# EAGLE board Qwiic-Step-Panel (EAGLE 9.4.2), part 1 of 2
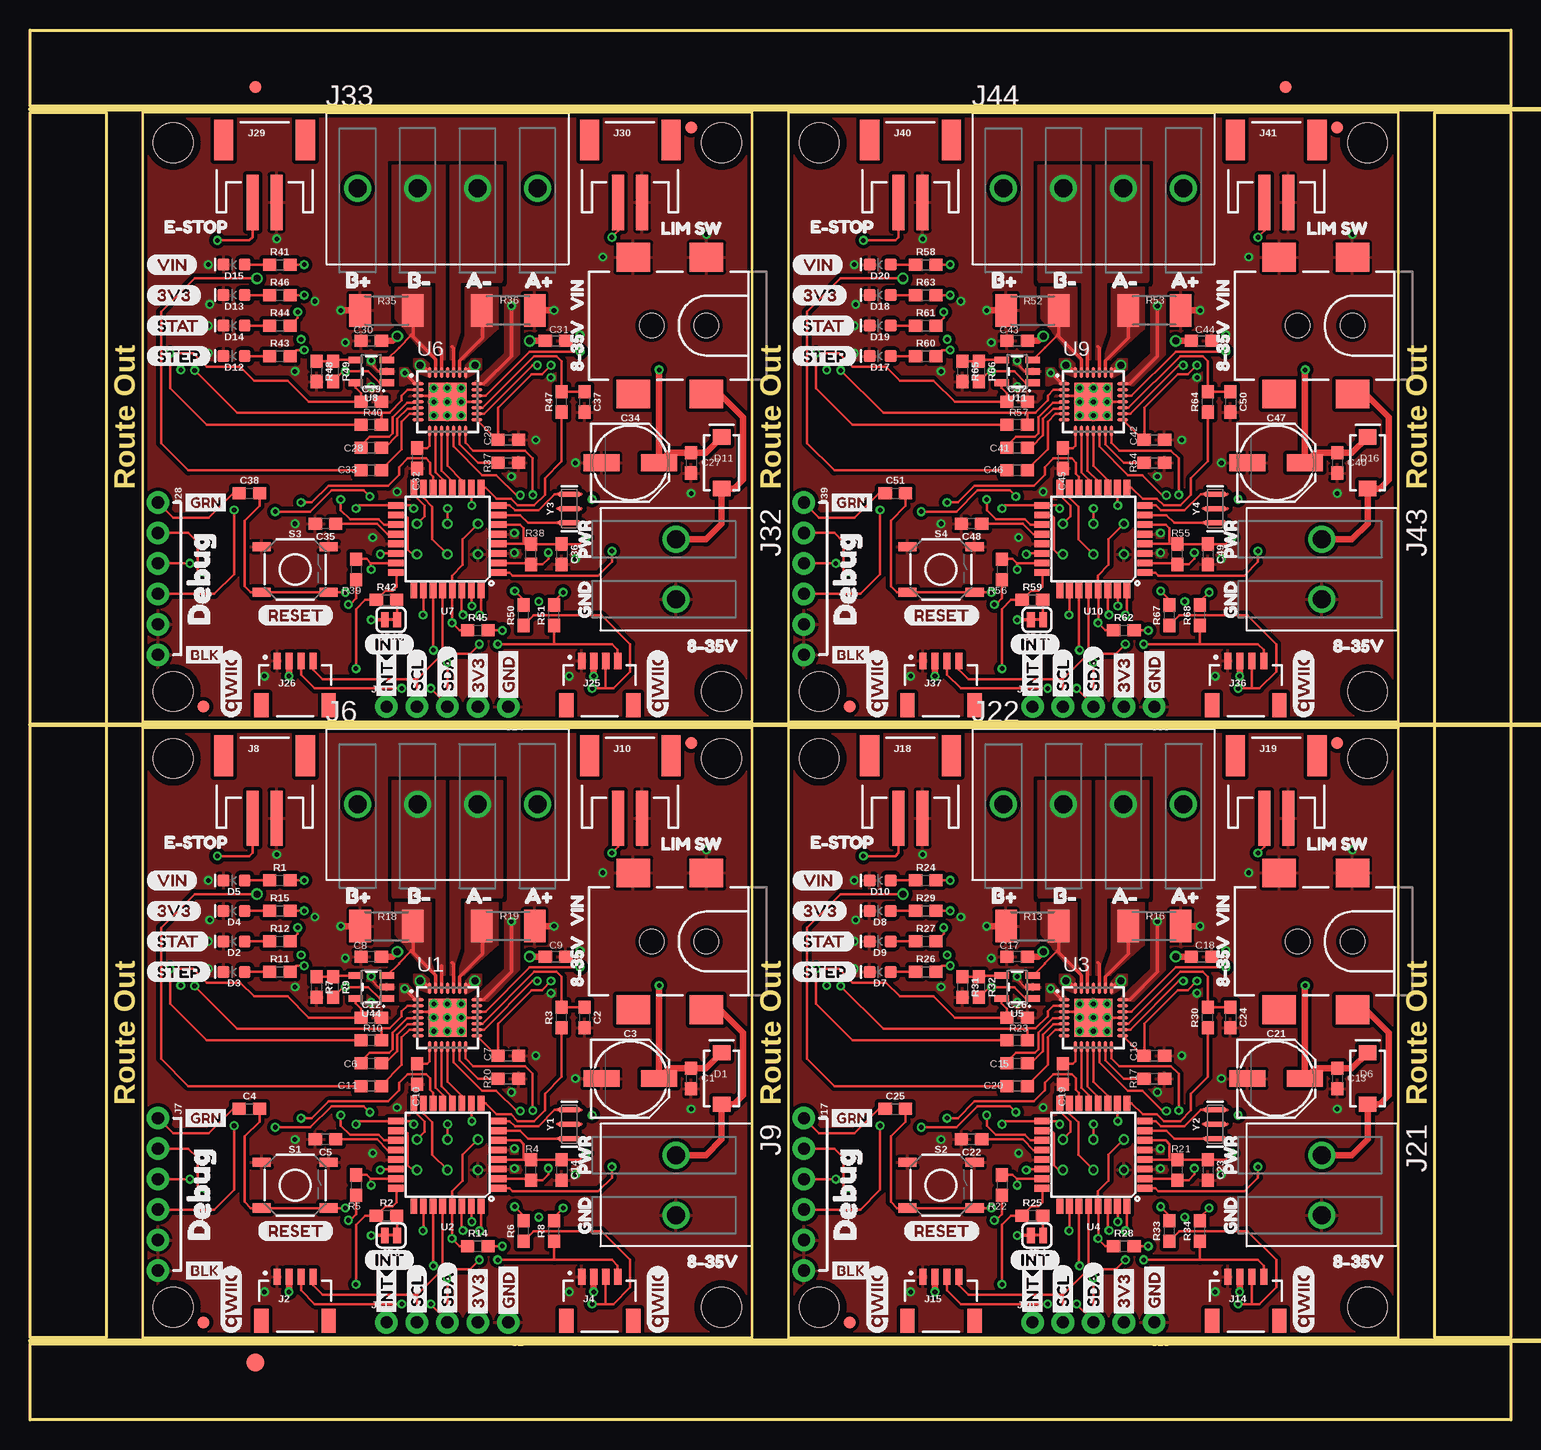
[diagram p0: board, top side]
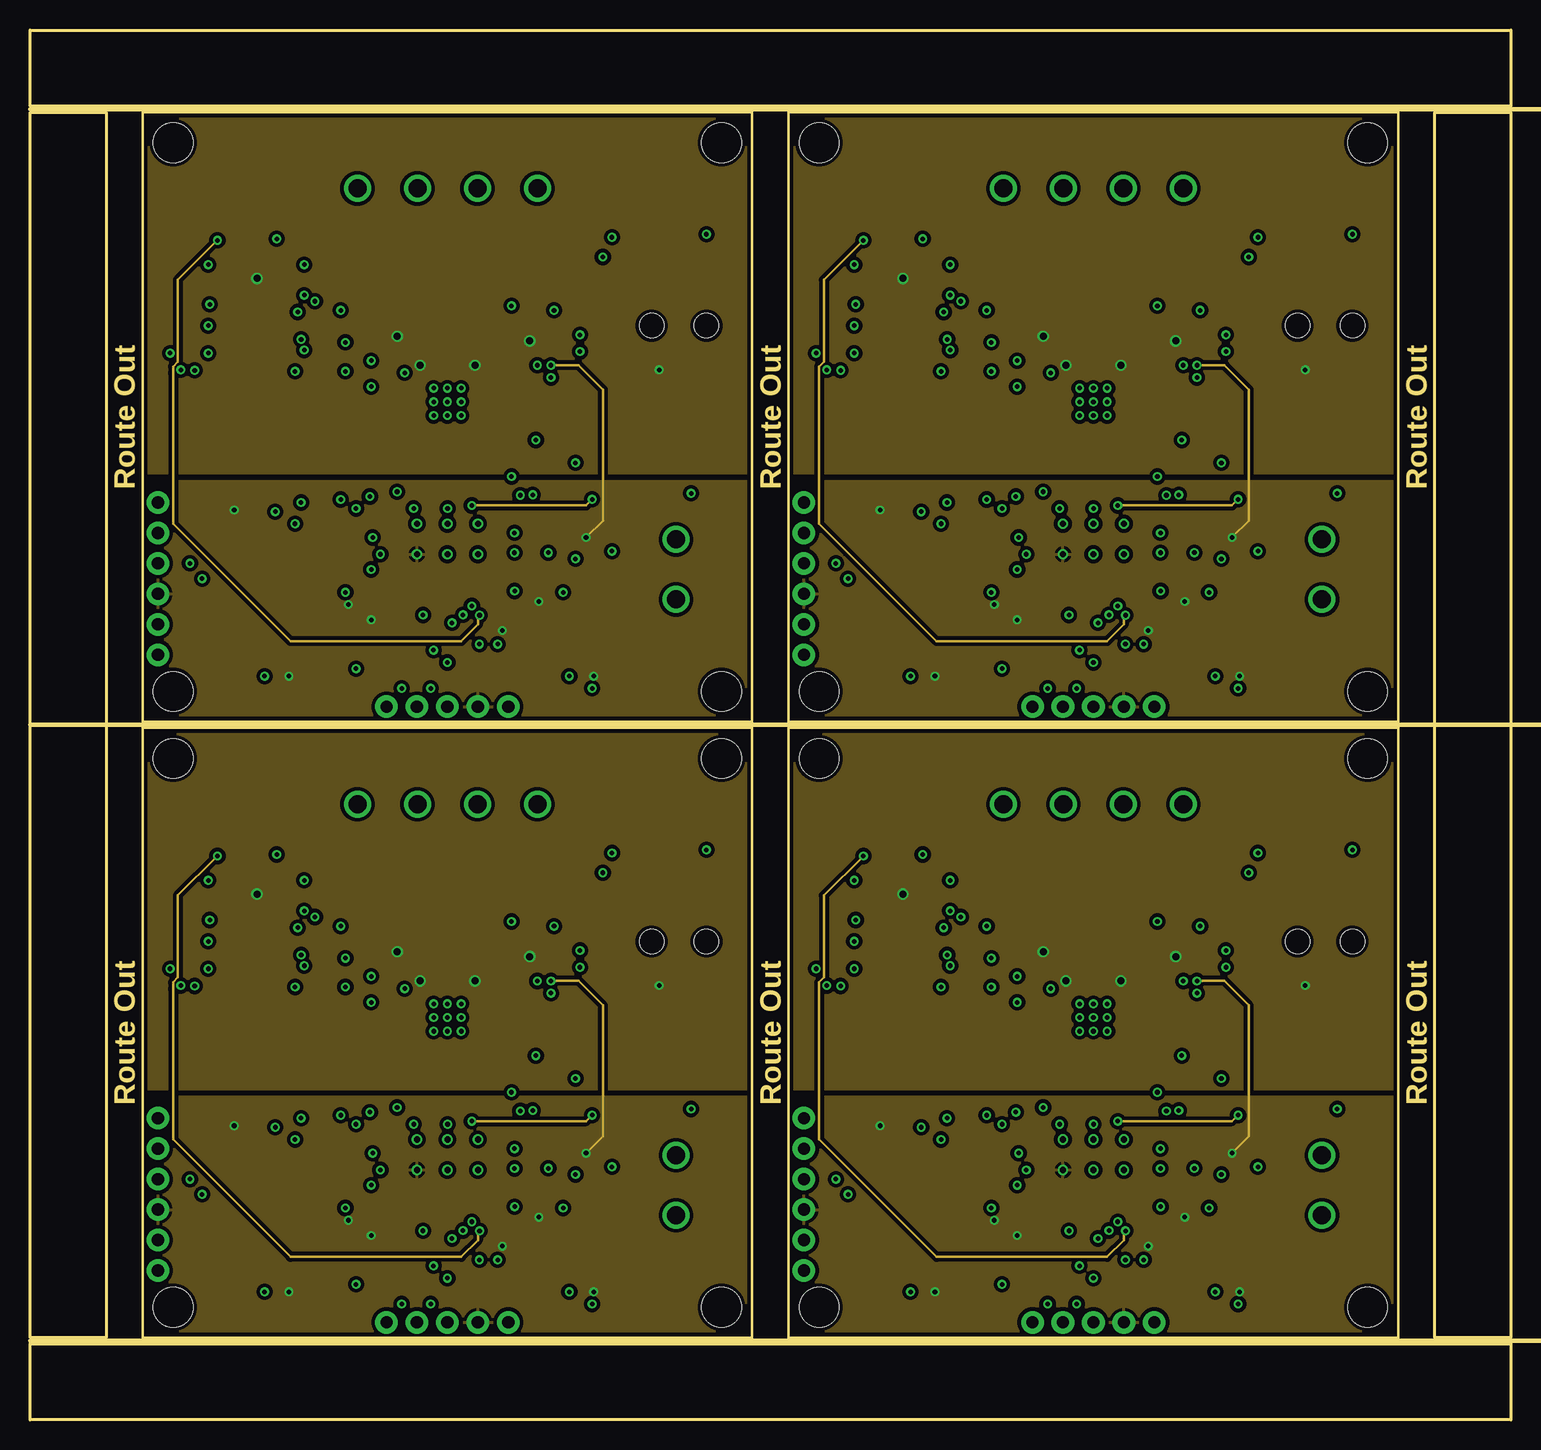
[diagram p1: board, inner layer Route2]
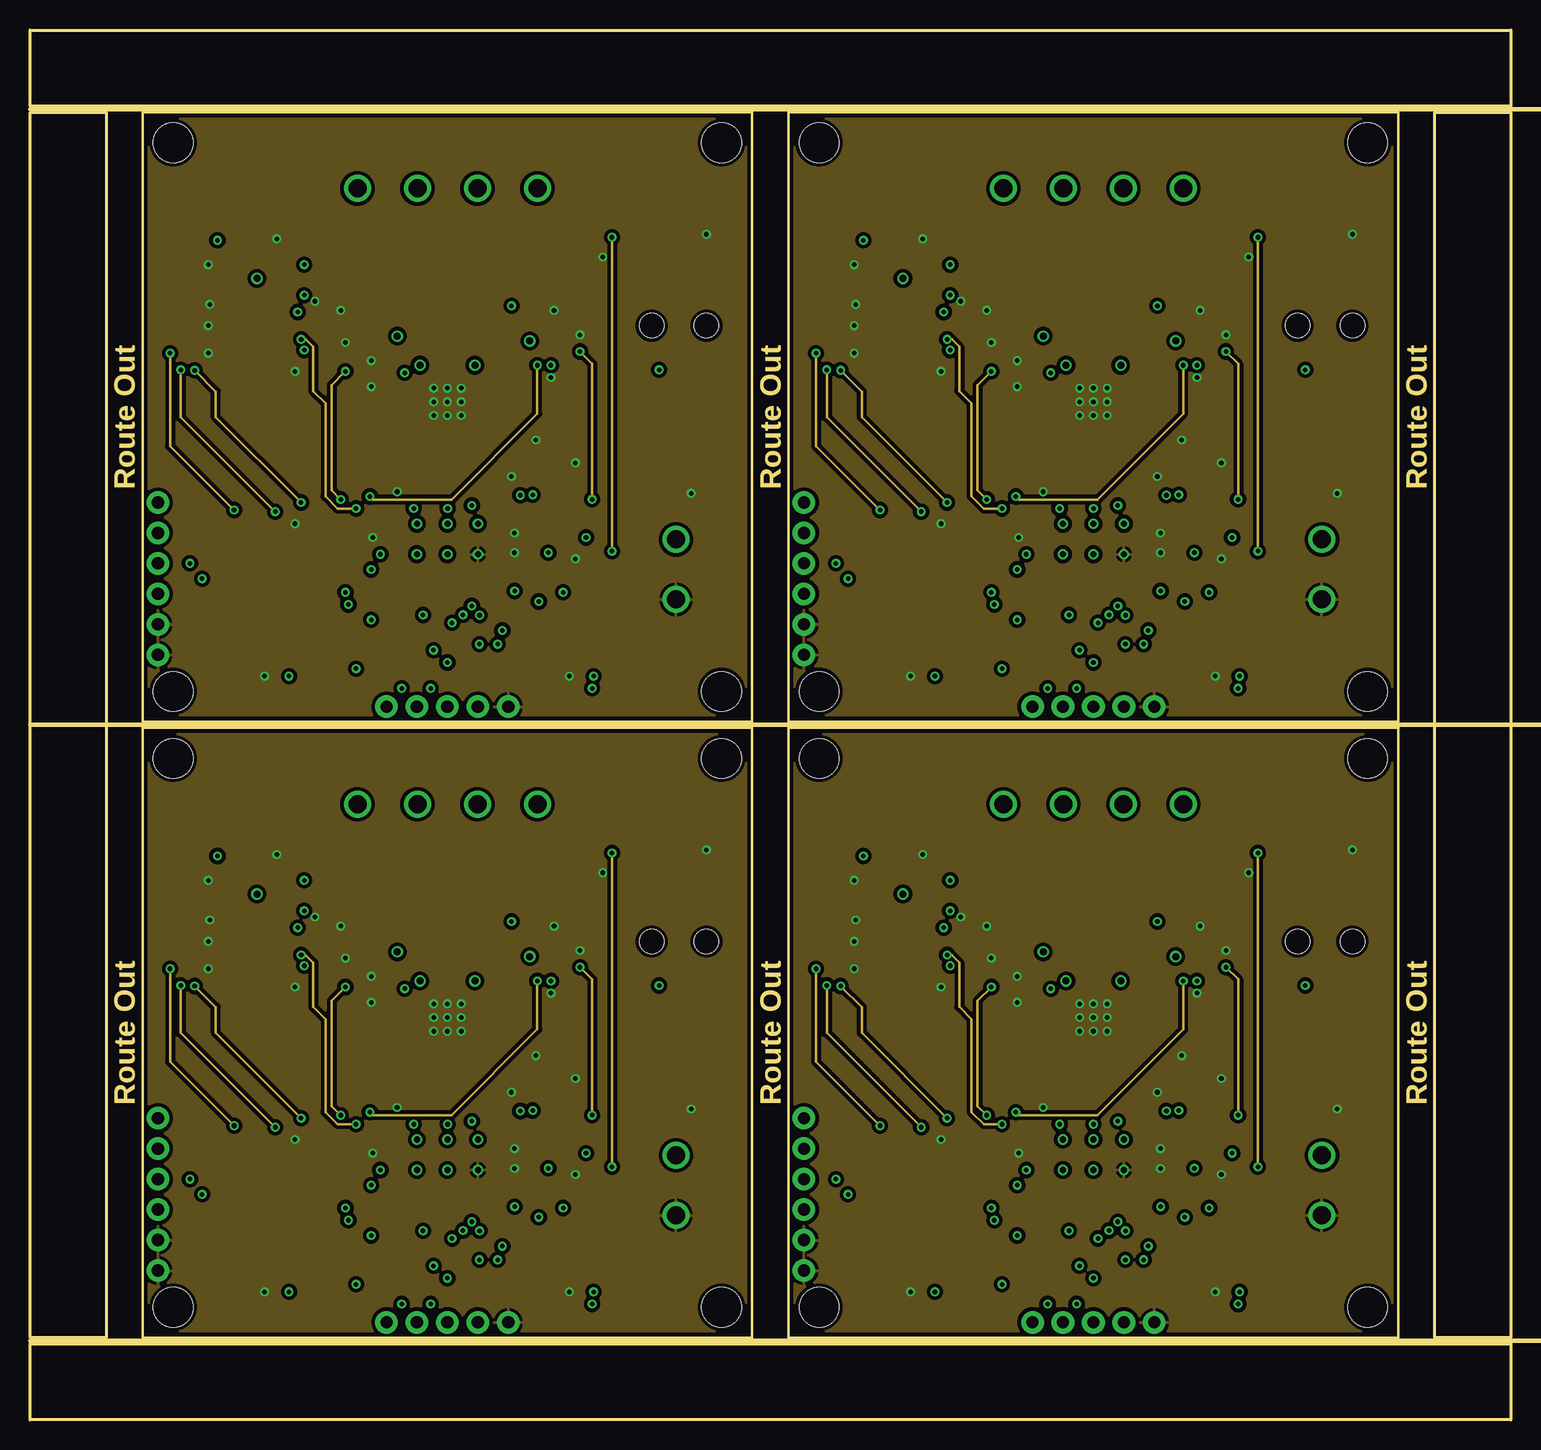
[diagram p2: board, inner layer Route15]
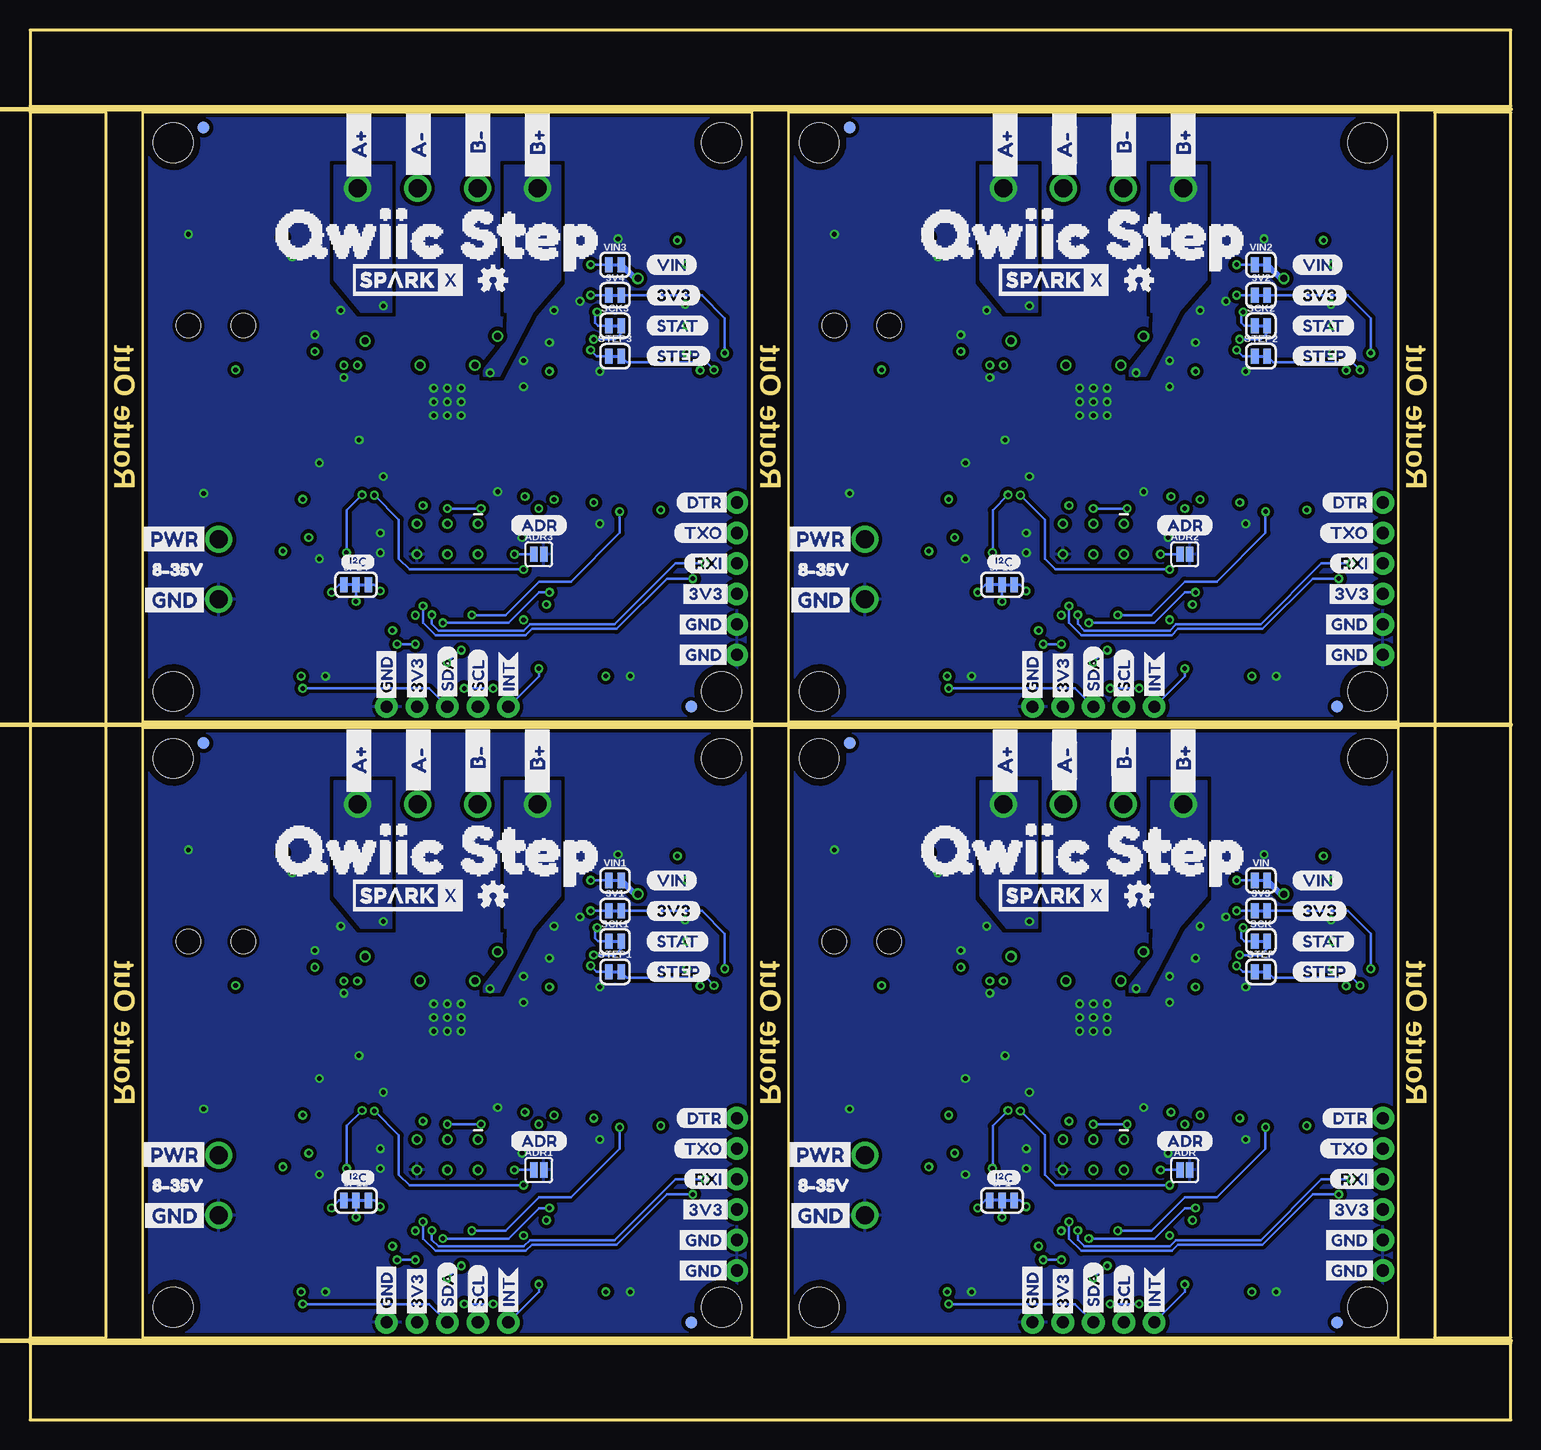
[diagram p3: board, bottom side, seen from below]

Size 123.44 x 115.82 mm. Coordinates in mm from the lower left corner, seen from the top.
Outline: 9.4,57.66 60.2,57.66 60.2,6.86 9.4,6.86 9.4,57.66
Outline: 63.25,57.66 114.05,57.66 114.05,6.86 63.25,6.86 63.25,57.66
Outline: 9.4,108.97 60.2,108.97 60.2,58.17 9.4,58.17 9.4,108.97
Outline: 63.25,108.97 114.05,108.97 114.05,58.17 63.25,58.17 63.25,108.97
Outline: 0,6.35 123.44,6.35 123.44,0 0,0 0,6.35
Outline: 117.09,108.97 123.44,108.97 123.44,6.86 117.09,6.86 117.09,108.97
Outline: 0,115.82 123.44,115.82 123.44,109.47 0,109.47 0,115.82
Outline: 0,108.97 6.35,108.97 6.35,6.86 0,6.86 0,108.97
Copper layers (1*2*15*16): Top 0.035559375mm / dielectric 0.47751875mm / Route2 0.035559375mm / dielectric 0.47751875mm / Route15 0.035559375mm / dielectric 0.47751875mm / Bottom 0.035559375mm
Design rules "SparkFun-4-layer-TIGHT": minimum track width 7mil, minimum drill 15mil, track to track 7mil, track to pad 7mil, pad to pad 7mil, via to via 7mil, smd to smd 7mil, copper to edge 7mil, drill to drill 7mil, minimum pad ring 7mil, minimum via ring 7mil, stop-mask expansion 4mil, vias tented up to drill 25mil, thermal gap 10mil
Net classes: 2 PWR: width 0.203 mm
Milling: 3 lines

## Footprints (pad centres in the part's own frame; a part is rotated, then mirrored left to right if it is on the bottom)
SMT-JUMPER_2_NC_TRACE_SILK = smd 0.635 x 1.27: 1 -0.508,0; 2 0.508,0
SMT-JUMPER_2_NO_SILK = smd 0.635 x 1.27: 1 -0.406,0; 2 0.406,0
0603 = smd 1.1 x 1: 1 -0.85,0; 2 0.85,0
PANASONIC_D = smd 3 x 1.4: + 2.4,0; - -2.4,0
SMA-DIODE = smd 1.27 x 1.47: A -2.15,0; C 2.15,0
LED-0603 = smd 1 x 1: A -0.877,0; C 0.877,0
FIDUCIAL-1X2 = smd 1 x 1: 1 0,0
FIDUCIAL-1.5X3 = smd 1.5 x 1.5: 1 0,0
1X04_NO_SILK = drill 1.016 pad 1.88: 1 0,0; 2 2.54,0; 3 5.08,0; 4 7.62,0
JST04_1MM_RA = smd 0.6 x 1.35: 1 -1.5,0; 2 -0.5,0; 3 0.5,0; 4 1.5,0 | smd 1.2 x 2: NC1 2.8,-3.675; NC2 -2.8,-3.675
POWER_JACK_SMD = smd 2.8 x 2.4: GND 0,-5.7; P$4 6.1,-5.7; VIN0 0,5.7; VIN1 6.1,5.7 | hole 2.032: 0,0; 4.572,0
2X3_TEST_POINTS = drill 0.508: 1 -2.54,-1.27; 2 -2.54,1.27; 3 0,-1.27; 4 0,1.27; 5 2.54,-1.27; 6 2.54,1.27
LATCHTERMINAL-5MM-4 = drill 1.5: P$1 -7.5,0; P$2 -2.5,0; P$3 2.5,0; P$4 7.5,0
1X06_NO_SILK = drill 1.016 pad 1.88: 1 0,0; 2 2.54,0; 3 5.08,0; 4 7.62,0; 5 10.16,0; 6 12.7,0
JST-2-SMD = smd 1 x 4.6: 1 -1,-3.7; 2 1,-3.7 | smd 1.6 x 3.4: NC1 -3.4,1.5; NC2 3.4,1.5
LATCHTERMINAL-5MM-2 = drill 1.5: P$1 -2.5,0; P$2 2.5,0
1X01_NO_SILK = drill 1.016 pad 1.88: 1 0,0
SMT-JUMPER_3_2-NC_TRACE_SILK = smd 0.635 x 1.27: 1 -1.016,0; 2 0,0; 3 1.016,0
STAND-OFF = hole 3.302: 0,0
2010 = smd 1.8 x 2.7: 1 -2.2,0; 2 2.2,0
TACTILE_SWITCH_SMD_5.2MM = smd 1.524 x 0.762: 1 -2.794,1.905; 2 2.794,1.905; 3 -2.794,-1.905; 4 2.794,-1.905
QFN-28-5MM = smd 0.94 x 0.3: 1 -2.44,1.5; 2 -2.44,1; 3 -2.44,0.5; 4 -2.44,0; 5 -2.44,-0.5; 6 -2.44,-1; 7 -2.44,-1.5; 15 2.44,-1.5; 16 2.44,-1; 17 2.44,-0.5; 18 2.44,0; 19 2.44,0.5; 20 2.44,1; 21 2.44,1.5 | smd 0.3 x 0.94: 8 -1.5,-2.44; 9 -1,-2.44; 10 -0.5,-2.44; 11 0,-2.44; 12 0.5,-2.44; 13 1,-2.44; 14 1.5,-2.44; 22 1.5,2.44; 23 1,2.44; 24 0.5,2.44; 25 0,2.44; 26 -0.5,2.44; 27 -1,2.44; 28 -1.5,2.44 | smd 3.175 x 3.175: 29 0,0
TQFP32-08 = smd 1.27 x 0.559: 1 -4.293,2.8; 2 -4.293,2; 3 -4.293,1.2; 4 -4.293,0.4; 5 -4.293,-0.4; 6 -4.293,-1.2; 7 -4.293,-2; 8 -4.293,-2.8; 17 4.293,-2.8; 18 4.293,-2; 19 4.293,-1.2; 20 4.293,-0.4; 21 4.293,0.4; 22 4.293,1.2; 23 4.293,2; 24 4.293,2.8 | smd 0.559 x 1.27: 9 -2.8,-4.293; 10 -2,-4.293; 11 -1.2,-4.293; 12 -0.4,-4.293; 13 0.4,-4.293; 14 1.2,-4.293; 15 2,-4.293; 16 2.8,-4.293; 25 2.8,4.293; 26 2,4.293; 27 1.2,4.293; 28 0.4,4.293; 29 -0.4,4.293; 30 -1.2,4.293; 31 -2,4.293; 32 -2.8,4.293
SOT23-5 = smd 0.55 x 1.2: 1 -0.95,-1.3; 2 0,-1.3; 3 0.95,-1.3; 4 0.95,1.3; 5 -0.95,1.3
RESONATOR-SMD-3.2X1.3 = smd 0.45 x 1.905: 1 -1.2,0; 2 0,0; 3 1.2,0

## Placement (x,y rotation side)
3V1  JUMPER-SMT_2_NC_TRACE_SILK  [SMT-JUMPER_2_NC_TRACE_SILK]  74.68,42.42 0 bottom
3V2  JUMPER-SMT_2_NC_TRACE_SILK  [SMT-JUMPER_2_NC_TRACE_SILK]  20.83,93.73 0 bottom
3V3  JUMPER-SMT_2_NC_TRACE_SILK  [SMT-JUMPER_2_NC_TRACE_SILK]  20.83,42.42 0 bottom
3V4  JUMPER-SMT_2_NC_TRACE_SILK  [SMT-JUMPER_2_NC_TRACE_SILK]  74.68,93.73 0 bottom
ADR  ADR  [SMT-JUMPER_2_NO_SILK]  27.18,20.83 0 bottom
ADR1  ADR  [SMT-JUMPER_2_NO_SILK]  81.03,20.83 0 bottom
ADR2  ADR  [SMT-JUMPER_2_NO_SILK]  27.18,72.14 0 bottom
ADR3  ADR  [SMT-JUMPER_2_NO_SILK]  81.03,72.14 0 bottom
C1  0.1uF  [0603]  55.12,28.45 270 top
C2  10nF  [0603]  46.23,33.53 270 top
C3  47uF  [PANASONIC_D]  50.04,28.45 0 top
C4  0.1uF  [0603]  18.29,25.91 0 top
C5  0.1uF  [0603]  24.64,23.37 180 top
C6  0.1uF  [0603]  28.45,29.72 0 top
C7  0.1uF  [0603]  39.88,30.35 0 top
C8  0.1uF  [0603]  28.45,38.61 180 top
C9  0.1uF  [0603]  43.81,38.61 0 top
C10  0.22uF  [0603]  32.26,28.83 270 top
C11  0.1uF  [0603]  28.45,27.81 180 top
C12  0.1uF  [0603]  28.45,33.53 0 top
C13  0.1uF  [0603]  108.97,28.45 270 top
C14  0.1uF  [0603]  44.32,20.83 270 top
C15  0.1uF  [0603]  82.3,29.72 0 top
C16  0.1uF  [0603]  93.73,30.35 0 top
C17  0.1uF  [0603]  82.3,38.61 180 top
C18  0.1uF  [0603]  97.66,38.61 0 top
C19  0.22uF  [0603]  86.11,28.83 270 top
C20  0.1uF  [0603]  82.3,27.81 180 top
C21  47uF  [PANASONIC_D]  103.89,28.45 0 top
C22  0.1uF  [0603]  78.49,23.37 180 top
C23  0.1uF  [0603]  98.17,20.83 270 top
C24  10nF  [0603]  100.08,33.53 270 top
C25  0.1uF  [0603]  72.14,25.91 0 top
C26  0.1uF  [0603]  82.3,33.53 0 top
C27  0.1uF  [0603]  55.12,79.76 270 top
C28  0.1uF  [0603]  28.45,81.03 0 top
C29  0.1uF  [0603]  39.88,81.66 0 top
C30  0.1uF  [0603]  28.45,89.92 180 top
C31  0.1uF  [0603]  43.81,89.92 0 top
C32  0.22uF  [0603]  32.26,80.14 270 top
C33  0.1uF  [0603]  28.45,79.12 180 top
C34  47uF  [PANASONIC_D]  50.04,79.76 0 top
C35  0.1uF  [0603]  24.64,74.68 180 top
C36  0.1uF  [0603]  44.32,72.14 270 top
C37  10nF  [0603]  46.23,84.84 270 top
C38  0.1uF  [0603]  18.29,77.22 0 top
C39  0.1uF  [0603]  28.45,84.84 0 top
C40  0.1uF  [0603]  108.97,79.76 270 top
C41  0.1uF  [0603]  82.3,81.03 0 top
C42  0.1uF  [0603]  93.73,81.66 0 top
C43  0.1uF  [0603]  82.3,89.92 180 top
C44  0.1uF  [0603]  97.66,89.92 0 top
C45  0.22uF  [0603]  86.11,80.14 270 top
C46  0.1uF  [0603]  82.3,79.12 180 top
C47  47uF  [PANASONIC_D]  103.89,79.76 0 top
C48  0.1uF  [0603]  78.49,74.68 180 top
C49  0.1uF  [0603]  98.17,72.14 270 top
C50  10nF  [0603]  100.08,84.84 270 top
C51  0.1uF  [0603]  72.14,77.22 0 top
C52  0.1uF  [0603]  82.3,84.84 0 top
D1  3A/40V/500mV  [SMA-DIODE]  57.66,28.45 90 top
D2  BLUE  [LED-0603]  17.02,39.88 180 top
D3  GREEN  [LED-0603]  17.02,37.34 180 top
D4  RED  [LED-0603]  17.02,42.42 180 top
D5  Yellow  [LED-0603]  17.02,44.96 180 top
D6  3A/40V/500mV  [SMA-DIODE]  111.51,28.45 90 top
D7  GREEN  [LED-0603]  70.87,37.34 180 top
D8  RED  [LED-0603]  70.87,42.42 180 top
D9  BLUE  [LED-0603]  70.87,39.88 180 top
D10  Yellow  [LED-0603]  70.87,44.96 180 top
D11  3A/40V/500mV  [SMA-DIODE]  57.66,79.76 90 top
D12  GREEN  [LED-0603]  17.02,88.65 180 top
D13  RED  [LED-0603]  17.02,93.73 180 top
D14  BLUE  [LED-0603]  17.02,91.19 180 top
D15  Yellow  [LED-0603]  17.02,96.27 180 top
D16  3A/40V/500mV  [SMA-DIODE]  111.51,79.76 90 top
D17  GREEN  [LED-0603]  70.87,88.65 180 top
D18  RED  [LED-0603]  70.87,93.73 180 top
D19  BLUE  [LED-0603]  70.87,91.19 180 top
D20  Yellow  [LED-0603]  70.87,96.27 180 top
E$1  [FIDUCIAL-1X2]  18.8,111.06 0 top
E$2  [FIDUCIAL-1X2]  104.65,111.06 0 top
E$3  [FIDUCIAL-1.5X3]  18.8,4.76 0 top
FD1  FIDUCIAL1X2  [FIDUCIAL-1X2]  14.48,8.13 0 top
FD2  FIDUCIAL1X2  [FIDUCIAL-1X2]  14.48,8.13 0 bottom
FD3  FIDUCIAL1X2  [FIDUCIAL-1X2]  55.12,56.39 0 bottom
FD4  FIDUCIAL1X2  [FIDUCIAL-1X2]  55.12,56.39 0 top
FD5  FIDUCIAL1X2  [FIDUCIAL-1X2]  68.33,8.13 0 top
FD6  FIDUCIAL1X2  [FIDUCIAL-1X2]  68.33,8.13 0 bottom
FD7  FIDUCIAL1X2  [FIDUCIAL-1X2]  108.97,56.39 0 bottom
FD8  FIDUCIAL1X2  [FIDUCIAL-1X2]  108.97,56.39 0 top
FD9  FIDUCIAL1X2  [FIDUCIAL-1X2]  14.48,59.44 0 top
FD10  FIDUCIAL1X2  [FIDUCIAL-1X2]  14.48,59.44 0 bottom
FD11  FIDUCIAL1X2  [FIDUCIAL-1X2]  55.12,107.7 0 bottom
FD12  FIDUCIAL1X2  [FIDUCIAL-1X2]  55.12,107.7 0 top
FD13  FIDUCIAL1X2  [FIDUCIAL-1X2]  68.33,59.44 0 top
FD14  FIDUCIAL1X2  [FIDUCIAL-1X2]  68.33,59.44 0 bottom
FD15  FIDUCIAL1X2  [FIDUCIAL-1X2]  108.97,107.7 0 bottom
FD16  FIDUCIAL1X2  [FIDUCIAL-1X2]  108.97,107.7 0 top
J1  PTH  [1X04_NO_SILK]  39.88,8.13 180 top
J2  Qwiic Right Angle  [JST04_1MM_RA]  22.1,11.94 0 top
J3  5.5x2.1mm Barrel  [POWER_JACK_SMD]  56.39,39.88 180 top
J4  Qwiic Right Angle  [JST04_1MM_RA]  47.5,11.94 0 top
J5  ISP  [2X3_TEST_POINTS]  34.8,22.1 180 bottom
J6  [LATCHTERMINAL-5MM-4]  34.8,51.31 0 top
J7  [1X06_NO_SILK]  10.67,25.15 270 top
J8  [JST-2-SMD]  19.56,53.85 0 top
J9  [LATCHTERMINAL-5MM-2]  53.85,19.56 270 top
J10  [JST-2-SMD]  50.04,53.85 0 top
J11  [1X01_NO_SILK]  29.72,8.13 0 top
J12  5.5x2.1mm Barrel  [POWER_JACK_SMD]  110.24,39.88 180 top
J13  PTH  [1X04_NO_SILK]  93.73,8.13 180 top
J14  Qwiic Right Angle  [JST04_1MM_RA]  101.35,11.94 0 top
J15  Qwiic Right Angle  [JST04_1MM_RA]  75.95,11.94 0 top
J16  ISP  [2X3_TEST_POINTS]  88.65,22.1 180 bottom
J17  [1X06_NO_SILK]  64.52,25.15 270 top
J18  [JST-2-SMD]  73.41,53.85 0 top
J19  [JST-2-SMD]  103.89,53.85 0 top
J20  [1X01_NO_SILK]  83.57,8.13 0 top
J21  [LATCHTERMINAL-5MM-2]  107.7,19.56 270 top
J22  [LATCHTERMINAL-5MM-4]  88.65,51.31 0 top
J23  5.5x2.1mm Barrel  [POWER_JACK_SMD]  56.39,91.19 180 top
J24  PTH  [1X04_NO_SILK]  39.88,59.44 180 top
J25  Qwiic Right Angle  [JST04_1MM_RA]  47.5,63.25 0 top
J26  Qwiic Right Angle  [JST04_1MM_RA]  22.1,63.25 0 top
J27  ISP  [2X3_TEST_POINTS]  34.8,73.41 180 bottom
J28  [1X06_NO_SILK]  10.67,76.45 270 top
J29  [JST-2-SMD]  19.56,105.16 0 top
J30  [JST-2-SMD]  50.04,105.16 0 top
J31  [1X01_NO_SILK]  29.72,59.44 0 top
J32  [LATCHTERMINAL-5MM-2]  53.85,70.87 270 top
J33  [LATCHTERMINAL-5MM-4]  34.8,102.62 0 top
J34  5.5x2.1mm Barrel  [POWER_JACK_SMD]  110.24,91.19 180 top
J35  PTH  [1X04_NO_SILK]  93.73,59.44 180 top
J36  Qwiic Right Angle  [JST04_1MM_RA]  101.35,63.25 0 top
J37  Qwiic Right Angle  [JST04_1MM_RA]  75.95,63.25 0 top
J38  ISP  [2X3_TEST_POINTS]  88.65,73.41 180 bottom
J39  [1X06_NO_SILK]  64.52,76.45 270 top
J40  [JST-2-SMD]  73.41,105.16 0 top
J41  [JST-2-SMD]  103.89,105.16 0 top
J42  [1X01_NO_SILK]  83.57,59.44 0 top
J43  [LATCHTERMINAL-5MM-2]  107.7,70.87 270 top
J44  [LATCHTERMINAL-5MM-4]  88.65,102.62 0 top
JP1  [SMT-JUMPER_3_2-NC_TRACE_SILK]  42.42,18.29 0 bottom
JP2  STAND-OFF  [STAND-OFF]  65.79,55.12 0 top
JP3  STAND-OFF  [STAND-OFF]  65.79,9.4 0 top
JP4  INT  [SMT-JUMPER_2_NC_TRACE_SILK]  83.95,15.37 180 top
JP5  STAND-OFF  [STAND-OFF]  111.51,9.4 0 top
JP6  INT  [SMT-JUMPER_2_NC_TRACE_SILK]  30.1,15.37 180 top
JP7  STAND-OFF  [STAND-OFF]  57.66,9.4 0 top
JP8  STAND-OFF  [STAND-OFF]  11.94,55.12 0 top
JP9  STAND-OFF  [STAND-OFF]  11.94,9.4 0 top
JP10  STAND-OFF  [STAND-OFF]  57.66,55.12 0 top
JP11  STAND-OFF  [STAND-OFF]  111.51,55.12 0 top
JP12  [SMT-JUMPER_3_2-NC_TRACE_SILK]  96.27,18.29 0 bottom
JP13  STAND-OFF  [STAND-OFF]  11.94,106.43 0 top
JP14  STAND-OFF  [STAND-OFF]  11.94,60.71 0 top
JP15  INT  [SMT-JUMPER_2_NC_TRACE_SILK]  30.1,66.67 180 top
JP16  STAND-OFF  [STAND-OFF]  57.66,60.71 0 top
JP17  STAND-OFF  [STAND-OFF]  57.66,106.43 0 top
JP18  [SMT-JUMPER_3_2-NC_TRACE_SILK]  42.42,69.6 0 bottom
JP19  STAND-OFF  [STAND-OFF]  65.79,106.43 0 top
JP20  STAND-OFF  [STAND-OFF]  65.79,60.71 0 top
JP21  INT  [SMT-JUMPER_2_NC_TRACE_SILK]  83.95,66.67 180 top
JP22  STAND-OFF  [STAND-OFF]  111.51,60.71 0 top
JP23  STAND-OFF  [STAND-OFF]  111.51,106.43 0 top
JP24  [SMT-JUMPER_3_2-NC_TRACE_SILK]  96.27,69.6 0 bottom
LOGO1  OSHW-LOGOMINI  [OSHW-LOGO-MINI]  30.99,43.69 0 bottom
LOGO2  OSHW-LOGOMINI  [OSHW-LOGO-MINI]  84.84,43.69 0 bottom
LOGO3  OSHW-LOGOMINI  [OSHW-LOGO-MINI]  30.99,95 0 bottom
LOGO4  OSHW-LOGOMINI  [OSHW-LOGO-MINI]  84.84,95 0 bottom
R1  4.7k  [0603]  20.83,44.96 0 top
R2  10k  [0603]  29.72,17.02 0 top
R3  33k  [0603]  44.32,33.53 90 top
R4  20k  [0603]  41.78,20.83 90 top
R5  20k  [0603]  27.18,19.56 270 top
R6  2.2k  [0603]  41.15,15.75 90 top
R7  1k  [0603]  23.88,36.07 270 top
R8  2.2k  [0603]  43.69,15.75 90 top
R9  22k  [0603]  25.27,36.07 270 top
R10  20k  [0603]  28.45,31.62 180 top
R11  1k  [0603]  20.83,37.34 0 top
R12  470  [0603]  20.83,39.88 0 top
R13  0.11  [2010]  83.57,41.15 0 top
R14  10k  [0603]  37.34,14.48 0 top
R15  1k  [0603]  20.83,42.42 0 top
R16  0.11  [2010]  93.73,41.15 180 top
R17  20k  [0603]  93.73,28.45 0 top
R18  0.11  [2010]  29.72,41.15 0 top
R19  0.11  [2010]  39.88,41.15 180 top
R20  20k  [0603]  39.88,28.45 0 top
R21  20k  [0603]  95.63,20.83 90 top
R22  20k  [0603]  81.03,19.56 270 top
R23  20k  [0603]  82.3,31.62 180 top
R24  4.7k  [0603]  74.68,44.96 0 top
R25  10k  [0603]  83.57,17.02 0 top
R26  1k  [0603]  74.68,37.34 0 top
R27  470  [0603]  74.68,39.88 0 top
R28  10k  [0603]  91.19,14.48 0 top
R29  1k  [0603]  74.68,42.42 0 top
R30  33k  [0603]  98.17,33.53 90 top
R31  1k  [0603]  77.72,36.07 270 top
R32  22k  [0603]  79.12,36.07 270 top
R33  2.2k  [0603]  95,15.75 90 top
R34  2.2k  [0603]  97.54,15.75 90 top
R35  0.11  [2010]  29.72,92.46 0 top
R36  0.11  [2010]  39.88,92.46 180 top
R37  20k  [0603]  39.88,79.76 0 top
R38  20k  [0603]  41.78,72.14 90 top
R39  20k  [0603]  27.18,70.87 270 top
R40  20k  [0603]  28.45,82.93 180 top
R41  4.7k  [0603]  20.83,96.27 0 top
R42  10k  [0603]  29.72,68.33 0 top
R43  1k  [0603]  20.83,88.65 0 top
R44  470  [0603]  20.83,91.19 0 top
R45  10k  [0603]  37.34,65.79 0 top
R46  1k  [0603]  20.83,93.73 0 top
R47  33k  [0603]  44.32,84.84 90 top
R48  1k  [0603]  23.88,87.38 270 top
R49  22k  [0603]  25.27,87.38 270 top
R50  2.2k  [0603]  41.15,67.06 90 top
R51  2.2k  [0603]  43.69,67.06 90 top
R52  0.11  [2010]  83.57,92.46 0 top
R53  0.11  [2010]  93.73,92.46 180 top
R54  20k  [0603]  93.73,79.76 0 top
R55  20k  [0603]  95.63,72.14 90 top
R56  20k  [0603]  81.03,70.87 270 top
R57  20k  [0603]  82.3,82.93 180 top
R58  4.7k  [0603]  74.68,96.27 0 top
R59  10k  [0603]  83.57,68.33 0 top
R60  1k  [0603]  74.68,88.65 0 top
R61  470  [0603]  74.68,91.19 0 top
R62  10k  [0603]  91.19,65.79 0 top
R63  1k  [0603]  74.68,93.73 0 top
R64  33k  [0603]  98.17,84.84 90 top
R65  1k  [0603]  77.72,87.38 270 top
R66  22k  [0603]  79.12,87.38 270 top
R67  2.2k  [0603]  95,67.06 90 top
R68  2.2k  [0603]  97.54,67.06 90 top
S1  Tall Switch  [TACTILE_SWITCH_SMD_5.2MM]  22.1,19.56 0 top
S2  Tall Switch  [TACTILE_SWITCH_SMD_5.2MM]  75.95,19.56 0 top
S3  Tall Switch  [TACTILE_SWITCH_SMD_5.2MM]  22.1,70.87 0 top
S4  Tall Switch  [TACTILE_SWITCH_SMD_5.2MM]  75.95,70.87 0 top
SCK  JUMPER-SMT_2_NC_TRACE_SILK  [SMT-JUMPER_2_NC_TRACE_SILK]  20.83,39.88 0 bottom
SCK1  JUMPER-SMT_2_NC_TRACE_SILK  [SMT-JUMPER_2_NC_TRACE_SILK]  74.68,39.88 0 bottom
SCK2  JUMPER-SMT_2_NC_TRACE_SILK  [SMT-JUMPER_2_NC_TRACE_SILK]  20.83,91.19 0 bottom
SCK3  JUMPER-SMT_2_NC_TRACE_SILK  [SMT-JUMPER_2_NC_TRACE_SILK]  74.68,91.19 0 bottom
STEP  JUMPER-SMT_2_NC_TRACE_SILK  [SMT-JUMPER_2_NC_TRACE_SILK]  20.83,37.34 0 bottom
STEP1  JUMPER-SMT_2_NC_TRACE_SILK  [SMT-JUMPER_2_NC_TRACE_SILK]  74.68,37.34 0 bottom
STEP2  JUMPER-SMT_2_NC_TRACE_SILK  [SMT-JUMPER_2_NC_TRACE_SILK]  20.83,88.65 0 bottom
STEP3  JUMPER-SMT_2_NC_TRACE_SILK  [SMT-JUMPER_2_NC_TRACE_SILK]  74.68,88.65 0 bottom
U1  A4988ALT1  [QFN-28-5MM]  34.8,33.53 0 top
U2  ATMEGA328P_TQFP  [TQFP32-08]  34.8,22.1 180 top
U3  A4988ALT1  [QFN-28-5MM]  88.65,33.53 0 top
U4  ATMEGA328P_TQFP  [TQFP32-08]  88.65,22.1 180 top
U5  OPA344  [SOT23-5]  82.3,36.07 90 top
U6  A4988ALT1  [QFN-28-5MM]  34.8,84.84 0 top
U7  ATMEGA328P_TQFP  [TQFP32-08]  34.8,73.41 180 top
U8  OPA344  [SOT23-5]  28.45,87.38 90 top
U9  A4988ALT1  [QFN-28-5MM]  88.65,84.84 0 top
U10  ATMEGA328P_TQFP  [TQFP32-08]  88.65,73.41 180 top
U11  OPA344  [SOT23-5]  82.3,87.38 90 top
U44  OPA344  [SOT23-5]  28.45,36.07 90 top
U$1  [3V30]  9.65,42.42 0 top
U$2  [3V37]  37.34,8.38 90 top
U$3  [GND8]  39.88,8.38 90 top
U$4  [STAT5]  9.65,39.88 0 top
U$5  [SCL5]  32.26,8.51 90 top
U$6  [SDA6]  34.8,8.51 90 top
U$7  [STEP4]  9.65,37.34 0 top
U$8  [VIN3]  9.65,44.96 0 top
U$9  [QWIIC_5.5MM]  16.76,10.03 90 top
U$10  [8#35V0]  45.59,35.18 90 top
U$11  [8#35V0]  60.33,19.56 0 bottom
U$12  [VIN1]  45.59,40.26 90 top
U$13  [STAT0]  18.29,39.88 0 bottom
U$14  [E#STOP2]  10.29,48.13 0 top
U$15  [I_SUPER2_C-()-03]  43.69,20.19 0 bottom
U$16  [I_SUPER2_C-()-03]  43.69,20.19 0 bottom
U$17  [3V31]  15.62,17.53 0 bottom
U$18  [DTR4]  15.75,25.15 0 bottom
U$19  [DEBUG0]  14.1,13.34 90 top
U$20  [BLK2]  12.57,12.45 0 top
U$21  [GND0]  15.88,14.99 0 bottom
U$22  [GND0]  15.88,12.45 0 bottom
U$23  [LIM_SW3]  51.69,48.01 0 top
U$24  [INT4]  29.72,8.51 90 top
U$25  [ADR0]  29.59,23.24 0 bottom
U$26  [3V35]  37.34,8.38 90 bottom
U$27  [RESET1]  18.92,15.75 0 top
U$28  [GRN1]  12.57,25.15 0 top
U$29  [QWIIC_5.5MM]  52.32,10.03 90 top
U$30  [INT4]  29.72,8.51 90 bottom
U$31  [GND6]  39.88,8.38 90 bottom
U$32  [A#2]  35.18,43.69 0 top
U$33  [SDA4]  34.8,8.51 90 bottom
U$34  [SCL3]  32.26,8.51 90 bottom
U$35  [RXI3]  15.11,20.07 0 bottom
U$36  [A#3]  40.13,43.69 0 top
U$37  [STEP2]  18.29,37.34 0 bottom
U$38  [VIN0]  18.29,44.96 0 bottom
U$39  [3V30]  63.5,42.42 0 top
U$40  [8#35V0]  53.85,13.21 0 top
U$41  [INT2]  27.81,13.34 0 top
U$42  [GND1]  46.23,14.61 90 top
U$43  [PWR0]  46.23,19.56 90 top
U$44  [GND0]  60.58,17.02 0 bottom
U$45  [3V31]  18.29,42.42 0 bottom
U$46  [B#4]  30.35,43.69 0 top
U$47  [B#5]  25.15,43.69 0 top
U$48  [TXO2]  16,22.61 0 bottom
U$49  SPARKX-LOGO4  [SPARKX-MEDIUM]  38.1,43.69 0 bottom
U$50  [3V37]  91.19,8.38 90 top
U$51  [GND8]  93.73,8.38 90 top
U$52  [SCL5]  86.11,8.51 90 top
U$53  [PWR1]  60.71,22.1 0 bottom
U$54  [A#2]  42.16,52.7 90 bottom
U$55  [A#3]  37.21,52.7 90 bottom
U$56  [QWIIC_STEP0]  52.58,47.5 0 bottom
U$57  [B#4]  27.3,52.96 90 bottom
U$58  [B#5]  32.26,53.09 90 bottom
U$59  [SDA6]  88.65,8.51 90 top
U$60  [STEP4]  63.5,37.34 0 top
U$61  [VIN3]  63.5,44.96 0 top
U$62  [STAT5]  63.5,39.88 0 top
U$63  [BLK2]  66.42,12.45 0 top
U$64  [GRN1]  66.42,25.15 0 top
U$65  [QWIIC_5.5MM]  70.61,10.03 90 top
U$66  [8#35V0]  99.44,35.18 90 top
U$67  [8#35V0]  114.17,19.56 0 bottom
U$68  [VIN1]  99.44,40.26 90 top
U$69  [E#STOP2]  64.14,48.13 0 top
U$70  [LIM_SW3]  105.54,48.01 0 top
U$71  [INT4]  83.57,8.51 90 top
U$72  [ADR0]  83.44,23.24 0 bottom
U$73  [RESET1]  72.77,15.75 0 top
U$74  [QWIIC_5.5MM]  106.17,10.03 90 top
U$75  [INT4]  83.57,8.51 90 bottom
U$76  [3V35]  91.19,8.38 90 bottom
U$77  [GND6]  93.73,8.38 90 bottom
U$78  [SDA4]  88.65,8.51 90 bottom
U$79  [SCL3]  86.11,8.51 90 bottom
U$80  [INT2]  81.66,13.34 0 top
U$81  [GND1]  100.08,14.61 90 top
U$82  [PWR0]  100.08,19.56 90 top
U$83  [3V31]  72.14,42.42 0 bottom
U$84  [STEP2]  72.14,37.34 0 bottom
U$85  [VIN0]  72.14,44.96 0 bottom
U$86  [QWIIC_STEP0]  106.43,47.5 0 bottom
U$87  [A#2]  89.03,43.69 0 top
U$88  [A#3]  93.98,43.69 0 top
U$89  [B#4]  84.2,43.69 0 top
U$90  [B#5]  78.99,43.69 0 top
U$91  [3V31]  69.47,17.53 0 bottom
U$92  [DTR4]  69.6,25.15 0 bottom
U$93  [GND0]  69.72,14.99 0 bottom
U$94  [GND0]  69.72,12.45 0 bottom
U$95  [RXI3]  68.96,20.07 0 bottom
U$96  [TXO2]  69.85,22.61 0 bottom
U$97  SPARKX-LOGO4  [SPARKX-MEDIUM]  91.95,43.69 0 bottom
U$98  [DEBUG0]  67.94,13.34 90 top
U$99  [8#35V0]  107.7,13.21 0 top
U$100  [GND0]  114.43,17.02 0 bottom
U$101  [PWR1]  114.55,22.1 0 bottom
U$102  [A#2]  96.01,52.7 90 bottom
U$103  [A#3]  91.06,52.7 90 bottom
U$104  [B#4]  81.15,52.96 90 bottom
U$105  [B#5]  86.11,53.09 90 bottom
U$106  [STAT0]  72.14,39.88 0 bottom
U$107  [I_SUPER2_C-()-03]  97.54,20.19 0 bottom
U$108  [I_SUPER2_C-()-03]  97.54,20.19 0 bottom
U$109  [3V30]  9.65,93.73 0 top
U$110  [3V37]  37.34,59.69 90 top
U$111  [GND8]  39.88,59.69 90 top
U$112  [SCL5]  32.26,59.82 90 top
U$113  [SDA6]  34.8,59.82 90 top
U$114  [STEP4]  9.65,88.65 0 top
U$115  [VIN3]  9.65,96.27 0 top
U$116  [STAT5]  9.65,91.19 0 top
U$117  [BLK2]  12.57,63.75 0 top
U$118  [GRN1]  12.57,76.45 0 top
U$119  [QWIIC_5.5MM]  16.76,61.34 90 top
U$120  [8#35V0]  45.59,86.49 90 top
U$121  [8#35V0]  60.33,70.87 0 bottom
U$122  [VIN1]  45.59,91.57 90 top
U$123  [E#STOP2]  10.29,99.44 0 top
U$124  [LIM_SW3]  51.69,99.31 0 top
U$125  [INT4]  29.72,59.82 90 top
U$126  [ADR0]  29.59,74.55 0 bottom
U$127  [RESET1]  18.92,67.06 0 top
U$128  [QWIIC_5.5MM]  52.32,61.34 90 top
U$129  [INT4]  29.72,59.82 90 bottom
U$130  [3V35]  37.34,59.69 90 bottom
U$131  [GND6]  39.88,59.69 90 bottom
U$132  [SDA4]  34.8,59.82 90 bottom
U$133  [SCL3]  32.26,59.82 90 bottom
U$134  [INT2]  27.81,64.64 0 top
U$135  [GND1]  46.23,65.91 90 top
U$136  [PWR0]  46.23,70.87 90 top
U$137  [3V31]  18.29,93.73 0 bottom
U$138  [STEP2]  18.29,88.65 0 bottom
U$139  [VIN0]  18.29,96.27 0 bottom
U$140  [QWIIC_STEP0]  52.58,98.81 0 bottom
U$141  [A#2]  35.18,95 0 top
U$142  [A#3]  40.13,95 0 top
U$143  [B#4]  30.35,95 0 top
U$144  [B#5]  25.15,95 0 top
U$145  [3V31]  15.62,68.83 0 bottom
U$146  [DTR4]  15.75,76.45 0 bottom
U$147  [GND0]  15.88,66.29 0 bottom
U$148  [GND0]  15.88,63.75 0 bottom
U$149  [RXI3]  15.11,71.37 0 bottom
U$150  [TXO2]  16,73.91 0 bottom
U$151  SPARKX-LOGO4  [SPARKX-MEDIUM]  38.1,95 0 bottom
U$152  [DEBUG0]  14.1,64.64 90 top
U$153  [8#35V0]  53.85,64.52 0 top
U$154  [GND0]  60.58,68.33 0 bottom
U$155  [PWR1]  60.71,73.41 0 bottom
U$156  [A#2]  42.16,104.01 90 bottom
U$157  [A#3]  37.21,104.01 90 bottom
U$158  [B#4]  27.3,104.27 90 bottom
U$159  [B#5]  32.26,104.39 90 bottom
U$160  [STAT0]  18.29,91.19 0 bottom
U$161  [I_SUPER2_C-()-03]  43.69,71.5 0 bottom
U$162  [I_SUPER2_C-()-03]  43.69,71.5 0 bottom
U$163  [3V30]  63.5,93.73 0 top
U$164  [3V37]  91.19,59.69 90 top
U$165  [GND8]  93.73,59.69 90 top
U$166  [SCL5]  86.11,59.82 90 top
U$167  [SDA6]  88.65,59.82 90 top
U$168  [STEP4]  63.5,88.65 0 top
U$169  [VIN3]  63.5,96.27 0 top
U$170  [STAT5]  63.5,91.19 0 top
U$171  [BLK2]  66.42,63.75 0 top
U$172  [GRN1]  66.42,76.45 0 top
U$173  [QWIIC_5.5MM]  70.61,61.34 90 top
U$174  [8#35V0]  99.44,86.49 90 top
U$175  [8#35V0]  114.17,70.87 0 bottom
U$176  [VIN1]  99.44,91.57 90 top
U$177  [E#STOP2]  64.14,99.44 0 top
U$178  [LIM_SW3]  105.54,99.31 0 top
U$179  [INT4]  83.57,59.82 90 top
U$180  [ADR0]  83.44,74.55 0 bottom
U$181  [RESET1]  72.77,67.06 0 top
U$182  [QWIIC_5.5MM]  106.17,61.34 90 top
U$183  [INT4]  83.57,59.82 90 bottom
U$184  [3V35]  91.19,59.69 90 bottom
U$185  [GND6]  93.73,59.69 90 bottom
U$186  [SDA4]  88.65,59.82 90 bottom
U$187  [SCL3]  86.11,59.82 90 bottom
U$188  [INT2]  81.66,64.64 0 top
U$189  [GND1]  100.08,65.91 90 top
U$190  [PWR0]  100.08,70.87 90 top
U$191  [3V31]  72.14,93.73 0 bottom
U$192  [STEP2]  72.14,88.65 0 bottom
U$193  [VIN0]  72.14,96.27 0 bottom
U$194  [QWIIC_STEP0]  106.43,98.81 0 bottom
U$195  [A#2]  89.03,95 0 top
U$196  [A#3]  93.98,95 0 top
U$197  [B#4]  84.2,95 0 top
U$198  [B#5]  78.99,95 0 top
U$199  [3V31]  69.47,68.83 0 bottom
U$200  [DTR4]  69.6,76.45 0 bottom
U$201  [GND0]  69.72,66.29 0 bottom
U$202  [GND0]  69.72,63.75 0 bottom
U$203  [RXI3]  68.96,71.37 0 bottom
U$204  [TXO2]  69.85,73.91 0 bottom
U$205  SPARKX-LOGO4  [SPARKX-MEDIUM]  91.95,95 0 bottom
U$206  [DEBUG0]  67.94,64.64 90 top
U$207  [8#35V0]  107.7,64.52 0 top
U$208  [GND0]  114.43,68.33 0 bottom
U$209  [PWR1]  114.55,73.41 0 bottom
U$210  [A#2]  96.01,104.01 90 bottom
U$211  [A#3]  91.06,104.01 90 bottom
U$212  [B#4]  81.15,104.27 90 bottom
U$213  [B#5]  86.11,104.39 90 bottom
U$214  [STAT0]  72.14,91.19 0 bottom
U$215  [I_SUPER2_C-()-03]  97.54,71.5 0 bottom
U$216  [I_SUPER2_C-()-03]  97.54,71.5 0 bottom
VIN  JUMPER-SMT_2_NC_TRACE_SILK  [SMT-JUMPER_2_NC_TRACE_SILK]  20.83,44.96 0 bottom
VIN1  JUMPER-SMT_2_NC_TRACE_SILK  [SMT-JUMPER_2_NC_TRACE_SILK]  74.68,44.96 0 bottom
VIN2  JUMPER-SMT_2_NC_TRACE_SILK  [SMT-JUMPER_2_NC_TRACE_SILK]  20.83,96.27 0 bottom
VIN3  JUMPER-SMT_2_NC_TRACE_SILK  [SMT-JUMPER_2_NC_TRACE_SILK]  74.68,96.27 0 bottom
Y1  16MHz  [RESONATOR-SMD-3.2X1.3]  44.96,24.64 90 top
Y2  16MHz  [RESONATOR-SMD-3.2X1.3]  98.81,24.64 90 top
Y3  16MHz  [RESONATOR-SMD-3.2X1.3]  44.96,75.95 90 top
Y4  16MHz  [RESONATOR-SMD-3.2X1.3]  98.81,75.95 90 top

## Library data of the parts
3V1-3V4 ADR ADR1-ADR3 JP1 JP4 JP6 JP12 JP15 JP18 JP21 JP24 SCK SCK1-SCK3 STEP STEP1-STEP3 VIN VIN1-VIN3 = SparkFun-Jumpers
C1 C4 C6 C8 C9 C11 C13 C15 C17 C18 C20 C25 C27 C28 C30 C31 C33 C38 C40 C41 C43 C44 C46 C51 = SparkFun-Capacitors; PROD_ID: CAP-08390
C2 C24 C37 C50 = SparkFun-Capacitors; PROD_ID: CAP-00867
C3 C21 C34 C47 = SparkFun-Capacitors; PROD_ID: CAP-08478
C5 C7 C12 C14 C16 C22 C23 C26 C29 C35 C36 C39 C42 C48 C49 C52 = SparkFun-Capacitors; PROD_ID: CAP-00810
C10 C19 C32 C45 = SparkFun-Capacitors; PROD_ID: CAP-09885
D1 D6 D11 D16 = SparkFun-DiscreteSemi; PROD_ID: DIO-09886
D2 D9 D14 D19 = SparkFun-LED; PROD_ID: DIO-08575
D3 D7 D12 D17 = SparkFun-LED; PROD_ID: DIO-00821
D4 D8 D13 D18 = SparkFun-LED; PROD_ID: DIO-00819
D5 D10 D15 D20 = SparkFun-LED; PROD_ID: DIO-09003
E$1 E$2 FD1-FD16 LOGO1-LOGO4 U$9 U$29 U$65 U$74 U$119 U$128 U$173 U$182 = SparkFun-Aesthetics
E$3 = SparkFun-Retired
J1 J13 J24 J35 U$49 U$97 U$151 U$205 = SparkX
J2 J4 J14 J15 J25 J26 J36 J37 = SparkFun-Connectors; PROD_ID: CONN-13694
J3 J12 J23 J34 = SparkFun-Connectors; PROD_ID: CONN-08106; SF_ID: PRT-12748
J5-J7 J9 J11 J16 J17 J20-J22 J27 J28 J31-J33 J38 J39 J42-J44 = SparkFun-Connectors
J8 J10 J18 J19 J29 J30 J40 J41 = SparkFun-Connectors; PROD_ID: CONN-11443
JP2 JP3 JP5 JP7-JP11 JP13 JP14 JP16 JP17 JP19 JP20 JP22 JP23 = SparkFun-Hardware
R1 R24 R41 R58 = SparkFun-Resistors; PROD_ID: RES-07857
R2 R14 R25 R28 R42 R45 R59 R62 = SparkFun-Resistors; PROD_ID: RES-00824
R3 R30 R47 R64 = SparkFun-Resistors; PROD_ID: RES-08416
R4 R5 R10 R17 R20-R23 R37-R40 R54-R57 = SparkFun-Resistors; PROD_ID: RES-09383
R6 R8 R33 R34 R50 R51 R67 R68 = SparkFun-Resistors; PROD_ID: RES-08272
R7 R11 R15 R26 R29 R31 R43 R46 R48 R60 R63 R65 = SparkFun-Resistors; PROD_ID: RES-07856
R9 R32 R49 R66 = SparkFun-Resistors; PROD_ID: RES-07853
R12 R27 R44 R61 = SparkFun-Resistors; PROD_ID: RES-07869
R13 R16 R18 R19 R35 R36 R52 R53 = SparkFun-Resistors; PROD_ID: RES-08354
S1-S4 = SparkFun-Switches; PROD_ID: SWCH-14139
U1 U3 U6 U9 = SparkFun-IC-Special-Function; PROD_ID: IC-11483
U2 U4 U7 U10 = SparkFun-IC-Microcontroller; PROD_ID: IC-09069
U5 U8 U11 U44 = SparkFun-IC-Amplifiers; PROD_ID: IC-08251
U$1-U$3 U$5-U$8 U$39 U$50-U$52 U$59-U$61 U$109-U$115 U$163-U$169 = buzzard_labels (8)
U$4 U$62 U$116 U$170 = buzzard_labels (13)
U$10-U$12 U$14 U$23 U$24 U$30 U$40 U$66-U$71 U$75 U$99 U$120-U$125 U$129 U$153 U$174-U$179 U$183 U$207 = buzzard_labels (16)
U$13 U$106 U$160 U$214 = buzzard_labels (43)
U$15 U$16 U$107 U$108 U$161 U$162 U$215 U$216 = Labels
U$17 U$18 U$21 U$22 U$35 U$48 U$91-U$96 U$145-U$150 U$199-U$204 = buzzard_labels (38)
U$19 U$98 U$152 U$206 = buzzard_labels (39)
U$20 U$28 U$63 U$64 U$117 U$118 U$171 U$172 = buzzard_labels
U$25 U$27 U$72 U$73 U$126 U$127 U$180 U$181 = buzzard_labels (18)
U$26 U$31 U$33 U$34 U$41-U$43 U$76-U$82 U$130-U$136 U$184-U$190 = buzzard_labels (19)
U$32 U$36 U$46 U$47 U$87-U$90 U$141-U$144 U$195-U$198 = buzzard_labels (31)
U$37 U$38 U$45 U$83-U$85 U$137-U$139 U$191-U$193 = buzzard_labels (28)
U$44 U$53-U$55 U$57 U$58 U$100-U$105 U$154-U$159 U$208-U$213 = buzzard_labels (42)
U$56 U$86 U$140 U$194 = buzzard_labels (34)
Y1-Y4 = SparkFun-Clocks; PROD_ID: XTAL-08900

## Nets
3.3V: 3V3.2 C7.1 C12.1 C14.1 J1.2 J2.2 J4.2 J5.2 J7.4 JP1.2 JP6.2 R4.2 R5.2 R10.2 R14.2 U1.15 U2.4 U2.6 U2.18 U44.5
3.3V1: 3V1.2 C16.1 C23.1 C26.1 J13.2 J14.2 J15.2 J16.2 J17.4 JP4.2 JP12.2 R21.2 R22.2 R23.2 R28.2 U3.15 U4.4 U4.6 U4.18 U5.5
3.3V2: 3V2.2 C29.1 C36.1 C39.1 J24.2 J25.2 J26.2 J27.2 J28.4 JP15.2 JP18.2 R38.2 R39.2 R40.2 R45.2 U6.15 U7.4 U7.6 U7.18 U8.5
3.3V3: 3V4.2 C42.1 C49.1 C52.1 J35.2 J36.2 J37.2 J38.2 J39.4 JP21.2 JP24.2 R55.2 R56.2 R57.2 R62.2 U9.15 U10.4 U10.6 U10.18 U11.5
!ENABLE!: R10.1 U1.2 U2.14
!ENABLE!1: R23.1 U3.2 U4.14
!ENABLE!2: R40.1 U6.2 U7.14
!ENABLE!3: R57.1 U9.2 U10.14
!RST!: C4.2 J5.5 R14.1 S1.3 S1.4 U2.29
!RST!1: C25.2 J16.5 R28.1 S2.3 S2.4 U4.29
!RST!2: C38.2 J27.5 R45.1 S3.3 S3.4 U7.29
!RST!3: C51.2 J38.5 R62.1 S4.3 S4.4 U10.29
!SLEEP!: R4.1 U1.14 U2.2
!SLEEP!1: R21.1 U3.14 U4.2
!SLEEP!2: R38.1 U6.14 U7.2
!SLEEP!3: R55.1 U9.14 U10.2
A49885_!RESET!: R5.1 U1.12 U2.23
A49885_!RESET!1: R22.1 U3.12 U4.23
A49885_!RESET!2: R39.1 U6.12 U7.23
A49885_!RESET!3: R56.1 U9.12 U10.23
AMP_CUR_SENSE: R9.2 U2.19 U44.1
AMP_CUR_SENSE1: R32.2 U4.19 U5.1
AMP_CUR_SENSE2: R49.2 U7.19 U8.1
AMP_CUR_SENSE3: R66.2 U10.19 U11.1
AREF: C5.1 U2.20
AREF1: C22.1 U4.20
AREF2: C35.1 U7.20
AREF3: C48.1 U10.20
COILA+: J6.P$4 U1.21
COILA+1: J22.P$4 U3.21
COILA+2: J33.P$4 U6.21
COILA+3: J44.P$4 U9.21
COILA-: J6.P$3 U1.24
COILA-1: J22.P$3 U3.24
COILA-2: J33.P$3 U6.24
COILA-3: J44.P$3 U9.24
COILB+: J6.P$1 U1.1
COILB+1: J22.P$1 U3.1
COILB+2: J33.P$1 U6.1
COILB+3: J44.P$1 U9.1
COILB-: J6.P$2 U1.26
COILB-1: J22.P$2 U3.26
COILB-2: J33.P$2 U6.26
COILB-3: J44.P$2 U9.26
CUR_REF: C2.1 R3.2 U1.17
CUR_REF1: C24.1 R30.2 U3.17
CUR_REF2: C37.1 R47.2 U6.17
CUR_REF3: C50.1 R64.2 U9.17
CUR_REF_PWM: R3.1 U2.9
CUR_REF_PWM1: R30.1 U4.9
CUR_REF_PWM2: R47.1 U7.9
CUR_REF_PWM3: R64.1 U10.9
CURRENT_SENSE: R18.2 U1.27 U44.3
CURRENT_SENSE1: R13.2 U3.27 U5.3
CURRENT_SENSE2: R35.2 U6.27 U8.3
CURRENT_SENSE3: R52.2 U9.27 U11.3
DIR: U1.19 U2.10
DIR1: U3.19 U4.10
DIR2: U6.19 U7.10
DIR3: U9.19 U10.10
DTR: C4.1 J7.1
DTR1: C25.1 J17.1
DTR2: C38.1 J28.1
DTR3: C51.1 J39.1
GND: ADR.2 C1.2 C2.2 C3.- C5.2 C7.2 C8.2 C9.2 C10.2 C12.2 C14.2 D2.C D3.C D4.C D5.C J1.1 J2.1 J3.GND J3.P$4 J4.1 J5.6 J7.5 J7.6 J8.2 J9.P$2 J10.2 R7.2 R18.1 R19.1 R20.2 S1.1 S1.2 U1.3 U1.18 U1.29 U2.3 U2.5 U2.21 U44.2 Y1.2
GND1: ADR1.2 C13.2 C16.2 C17.2 C18.2 C19.2 C21.- C22.2 C23.2 C24.2 C26.2 D7.C D8.C D9.C D10.C J12.GND J12.P$4 J13.1 J14.1 J15.1 J16.6 J17.5 J17.6 J18.2 J19.2 J21.P$2 R13.1 R16.1 R17.2 R31.2 S2.1 S2.2 U3.3 U3.18 U3.29 U4.3 U4.5 U4.21 U5.2 Y2.2
GND2: ADR2.2 C27.2 C29.2 C30.2 C31.2 C32.2 C34.- C35.2 C36.2 C37.2 C39.2 D12.C D13.C D14.C D15.C J23.GND J23.P$4 J24.1 J25.1 J26.1 J27.6 J28.5 J28.6 J29.2 J30.2 J32.P$2 R35.1 R36.1 R37.2 R48.2 S3.1 S3.2 U6.3 U6.18 U6.29 U7.3 U7.5 U7.21 U8.2 Y3.2
GND3: ADR3.2 C40.2 C42.2 C43.2 C44.2 C45.2 C47.- C48.2 C49.2 C50.2 C52.2 D17.C D18.C D19.C D20.C J34.GND J34.P$4 J35.1 J36.1 J37.1 J38.6 J39.5 J39.6 J40.2 J41.2 J43.P$2 R52.1 R53.1 R54.2 R65.2 S4.1 S4.2 U9.3 U9.18 U9.29 U10.3 U10.5 U10.21 U11.2 Y4.2
INT: J11.1 R2.1 U2.24
INT0: J8.1 U2.32
INT1: J10.1 U2.1
INT2: J20.1 R25.1 U4.24
INT3: J18.1 U4.32
INT4: J19.1 U4.1
INT5: J31.1 R42.1 U7.24
INT6: J29.1 U7.32
INT7: J30.1 U7.1
INT8: J42.1 R59.1 U10.24
INT9: J40.1 U10.32
INT10: J41.1 U10.1
MISO: J5.1 U2.16
MISO1: J16.1 U4.16
MISO2: J27.1 U7.16
MISO3: J38.1 U10.16
MOSI: J5.4 U2.15
MOSI1: J16.4 U4.15
MOSI2: J27.4 U7.15
MOSI3: J38.4 U10.15
MS1: U1.9 U2.13
MS2: U1.10 U2.12
MS3: U1.11 U2.11
MS4: U3.10 U4.12
MS5: U3.11 U4.11
MS6: U3.9 U4.13
MS7: U6.10 U7.12
MS8: U6.11 U7.11
MS9: U6.9 U7.13
MS10: U9.10 U10.12
MS11: U9.11 U10.11
MS12: U9.9 U10.13
N$1: D3.A R11.1
N$2: R7.1 R9.1 U44.4
N$3: R19.2 U1.23
N$4: R1.2 VIN.1
N$5: JP6.1 R2.2
N$6: ADR.1 U2.22
N$7: D1.A J3.VIN0 J9.P$1
N$8: C6.1 U1.4
N$9: C6.2 U1.5
N$10: D5.A R1.1
N$11: R11.2 STEP.1
N$12: D2.A R12.1
N$13: U2.7 Y1.1
N$14: U2.8 Y1.3
N$15: JP1.3 R6.2
N$16: JP1.1 R8.2
N$17: R12.2 SCK.1
N$18: C15.1 U3.4
N$19: R20.1 U1.13
N$20: C10.1 U1.8
N$21: C11.1 U1.6
N$22: C15.2 U3.5
N$23: R17.1 U3.13
N$24: C19.1 U3.8
N$25: C20.1 U3.6
N$26: D4.A R15.1
N$27: 3V3.1 R15.2
N$28: D10.A R24.1
N$29: R24.2 VIN1.1
N$30: D6.A J12.VIN0 J21.P$1
N$31: D7.A R26.1
N$32: R26.2 STEP1.1
N$33: U4.7 Y2.1
N$34: U4.8 Y2.3
N$35: D8.A R29.1
N$36: 3V1.1 R29.2
N$37: JP4.1 R25.2
N$38: R31.1 R32.1 U5.4
N$39: R16.2 U3.23
N$40: ADR1.1 U4.22
N$41: D9.A R27.1
N$42: JP12.3 R33.2
N$43: JP12.1 R34.2
N$44: R27.2 SCK1.1
N$45: C28.1 U6.4
N$46: C28.2 U6.5
N$47: R37.1 U6.13
N$48: C32.1 U6.8
N$49: C33.1 U6.6
N$50: D15.A R41.1
N$51: R41.2 VIN2.1
N$52: D11.A J23.VIN0 J32.P$1
N$53: D12.A R43.1
N$54: R43.2 STEP2.1
N$55: U7.7 Y3.1
N$56: U7.8 Y3.3
N$57: D13.A R46.1
N$58: 3V2.1 R46.2
N$59: JP15.1 R42.2
N$60: R48.1 R49.1 U8.4
N$61: R36.2 U6.23
N$62: ADR2.1 U7.22
N$63: D14.A R44.1
N$64: JP18.3 R50.2
N$65: JP18.1 R51.2
N$66: R44.2 SCK2.1
N$67: C41.1 U9.4
N$68: C41.2 U9.5
N$69: R54.1 U9.13
N$70: C45.1 U9.8
N$71: C46.1 U9.6
N$72: D20.A R58.1
N$73: R58.2 VIN3.1
N$74: D16.A J34.VIN0 J43.P$1
N$75: D17.A R60.1
N$76: R60.2 STEP3.1
N$77: U10.7 Y4.1
N$78: U10.8 Y4.3
N$79: D18.A R63.1
N$80: 3V4.1 R63.2
N$81: JP21.1 R59.2
N$82: R65.1 R66.1 U11.4
N$83: R53.2 U9.23
N$84: ADR3.1 U10.22
N$85: D19.A R61.1
N$86: JP24.3 R67.2
N$87: JP24.1 R68.2
N$88: R61.2 SCK3.1
RXI: J7.3 U2.30
RXI1: J17.3 U4.30
RXI2: J28.3 U7.30
RXI3: J39.3 U10.30
SCK: J5.3 SCK.2 U2.17
SCK1: J16.3 SCK1.2 U4.17
SCK2: J27.3 SCK2.2 U7.17
SCK3: J38.3 SCK3.2 U10.17
SCL: J1.4 J2.4 J4.4 R8.1 U2.28
SCL1: J13.4 J14.4 J15.4 R34.1 U4.28
SCL2: J24.4 J25.4 J26.4 R51.1 U7.28
SCL3: J35.4 J36.4 J37.4 R68.1 U10.28
SDA: J1.3 J2.3 J4.3 R6.1 U2.27
SDA1: J13.3 J14.3 J15.3 R33.1 U4.27
SDA2: J24.3 J25.3 J26.3 R50.1 U7.27
SDA3: J35.3 J36.3 J37.3 R67.1 U10.27
STEP: STEP.2 U1.16 U2.26
STEP1: STEP1.2 U3.16 U4.26
STEP2: STEP2.2 U6.16 U7.26
STEP3: STEP3.2 U9.16 U10.26
TXO: J7.2 U2.31
TXO1: J17.2 U4.31
TXO2: J28.2 U7.31
TXO3: J39.2 U10.31
VIN [PWR]: C1.1 C3.+ C8.1 C9.1 C11.2 D1.C U1.22 U1.28 VIN.2
VIN1 [PWR]: C13.1 C17.1 C18.1 C20.2 C21.+ D6.C U3.22 U3.28 VIN1.2
VIN2 [PWR]: C27.1 C30.1 C31.1 C33.2 C34.+ D11.C U6.22 U6.28 VIN2.2
VIN3 [PWR]: C40.1 C43.1 C44.1 C46.2 C47.+ D16.C U9.22 U9.28 VIN3.2